# EAGLE board PS-VCO (Triple) (EAGLE 6.6.0)

No outline drawn. Coordinates in mm, seen from the top.
Copper layers (1*16): Top 0.035mm / dielectric 1.5mm / Bottom 0.035mm
Design rules "default": minimum track width 10mil, minimum drill 24mil, track to track 8mil, track to pad 8mil, pad to pad 8mil, via to via 8mil, smd to smd 8mil, copper to edge 40mil, drill to drill 8mil, minimum pad ring 10mil, minimum via ring 8mil, stop-mask expansion 4mil, vias tented up to drill 0mil, thermal gap 10mil

## Placement (x,y rotation side)
E$1  [4U_1]  0,0 0 top
E$2  [POTENTIOMETER_TAYDA_6MM]  12.7,34.29 180 top
E$3  [POTENTIOMETER_TAYDA_6MM]  12.7,143.51 180 top
E$4  [3.5MM_JACK_TAYDA]  13.97,53.34 270 top
E$5  [3.5MM_JACK_TAYDA]  13.97,162.56 270 top
E$6  [3.5MM_JACK_TAYDA]  13.97,124.46 270 top
E$7  [LED_3MM]  5.08,162.56 0 top
E$8  [LED_3MM]  5.08,124.46 0 top
E$9  [LED_3MM]  5.08,53.34 0 top
E$10  [3.5MM_JACK_TAYDA]  13.97,15.24 270 top
E$11  [LED_3MM]  5.08,15.24 0 top
E$12  [POTENTIOMETER_TAYDA_6MM]  12.7,88.9 180 top
E$13  [3.5MM_JACK_TAYDA]  13.97,107.95 270 top
E$14  [LED_3MM]  5.08,107.95 0 top
E$15  [3.5MM_JACK_TAYDA]  13.97,69.85 270 top
E$16  [LED_3MM]  5.08,69.85 0 top

## Library data of the parts
E$1-E$16 = !synth_panel

## Text on the board
Artwork: CV-IN | CV-MAN | PS-VCO | SQUARE_OUT | CV-IN | PS-VCO | CV-MAN | SQUARE_OUT | CV-IN | PS-VCO | CV-MAN | SQUARE_OUT